# Altium PCB Dolphin.PcbDoc (part 2 of 3)
Units mil, origin at the board's own origin, x right, y up, seen from the top; angles counter-clockwise.
Board outline 4250 x 2750 mil, 4 copper layers (Top Layer, GND, POWER, Bottom Layer); 213 components, 151 nets, 660 pads, 338 vias.
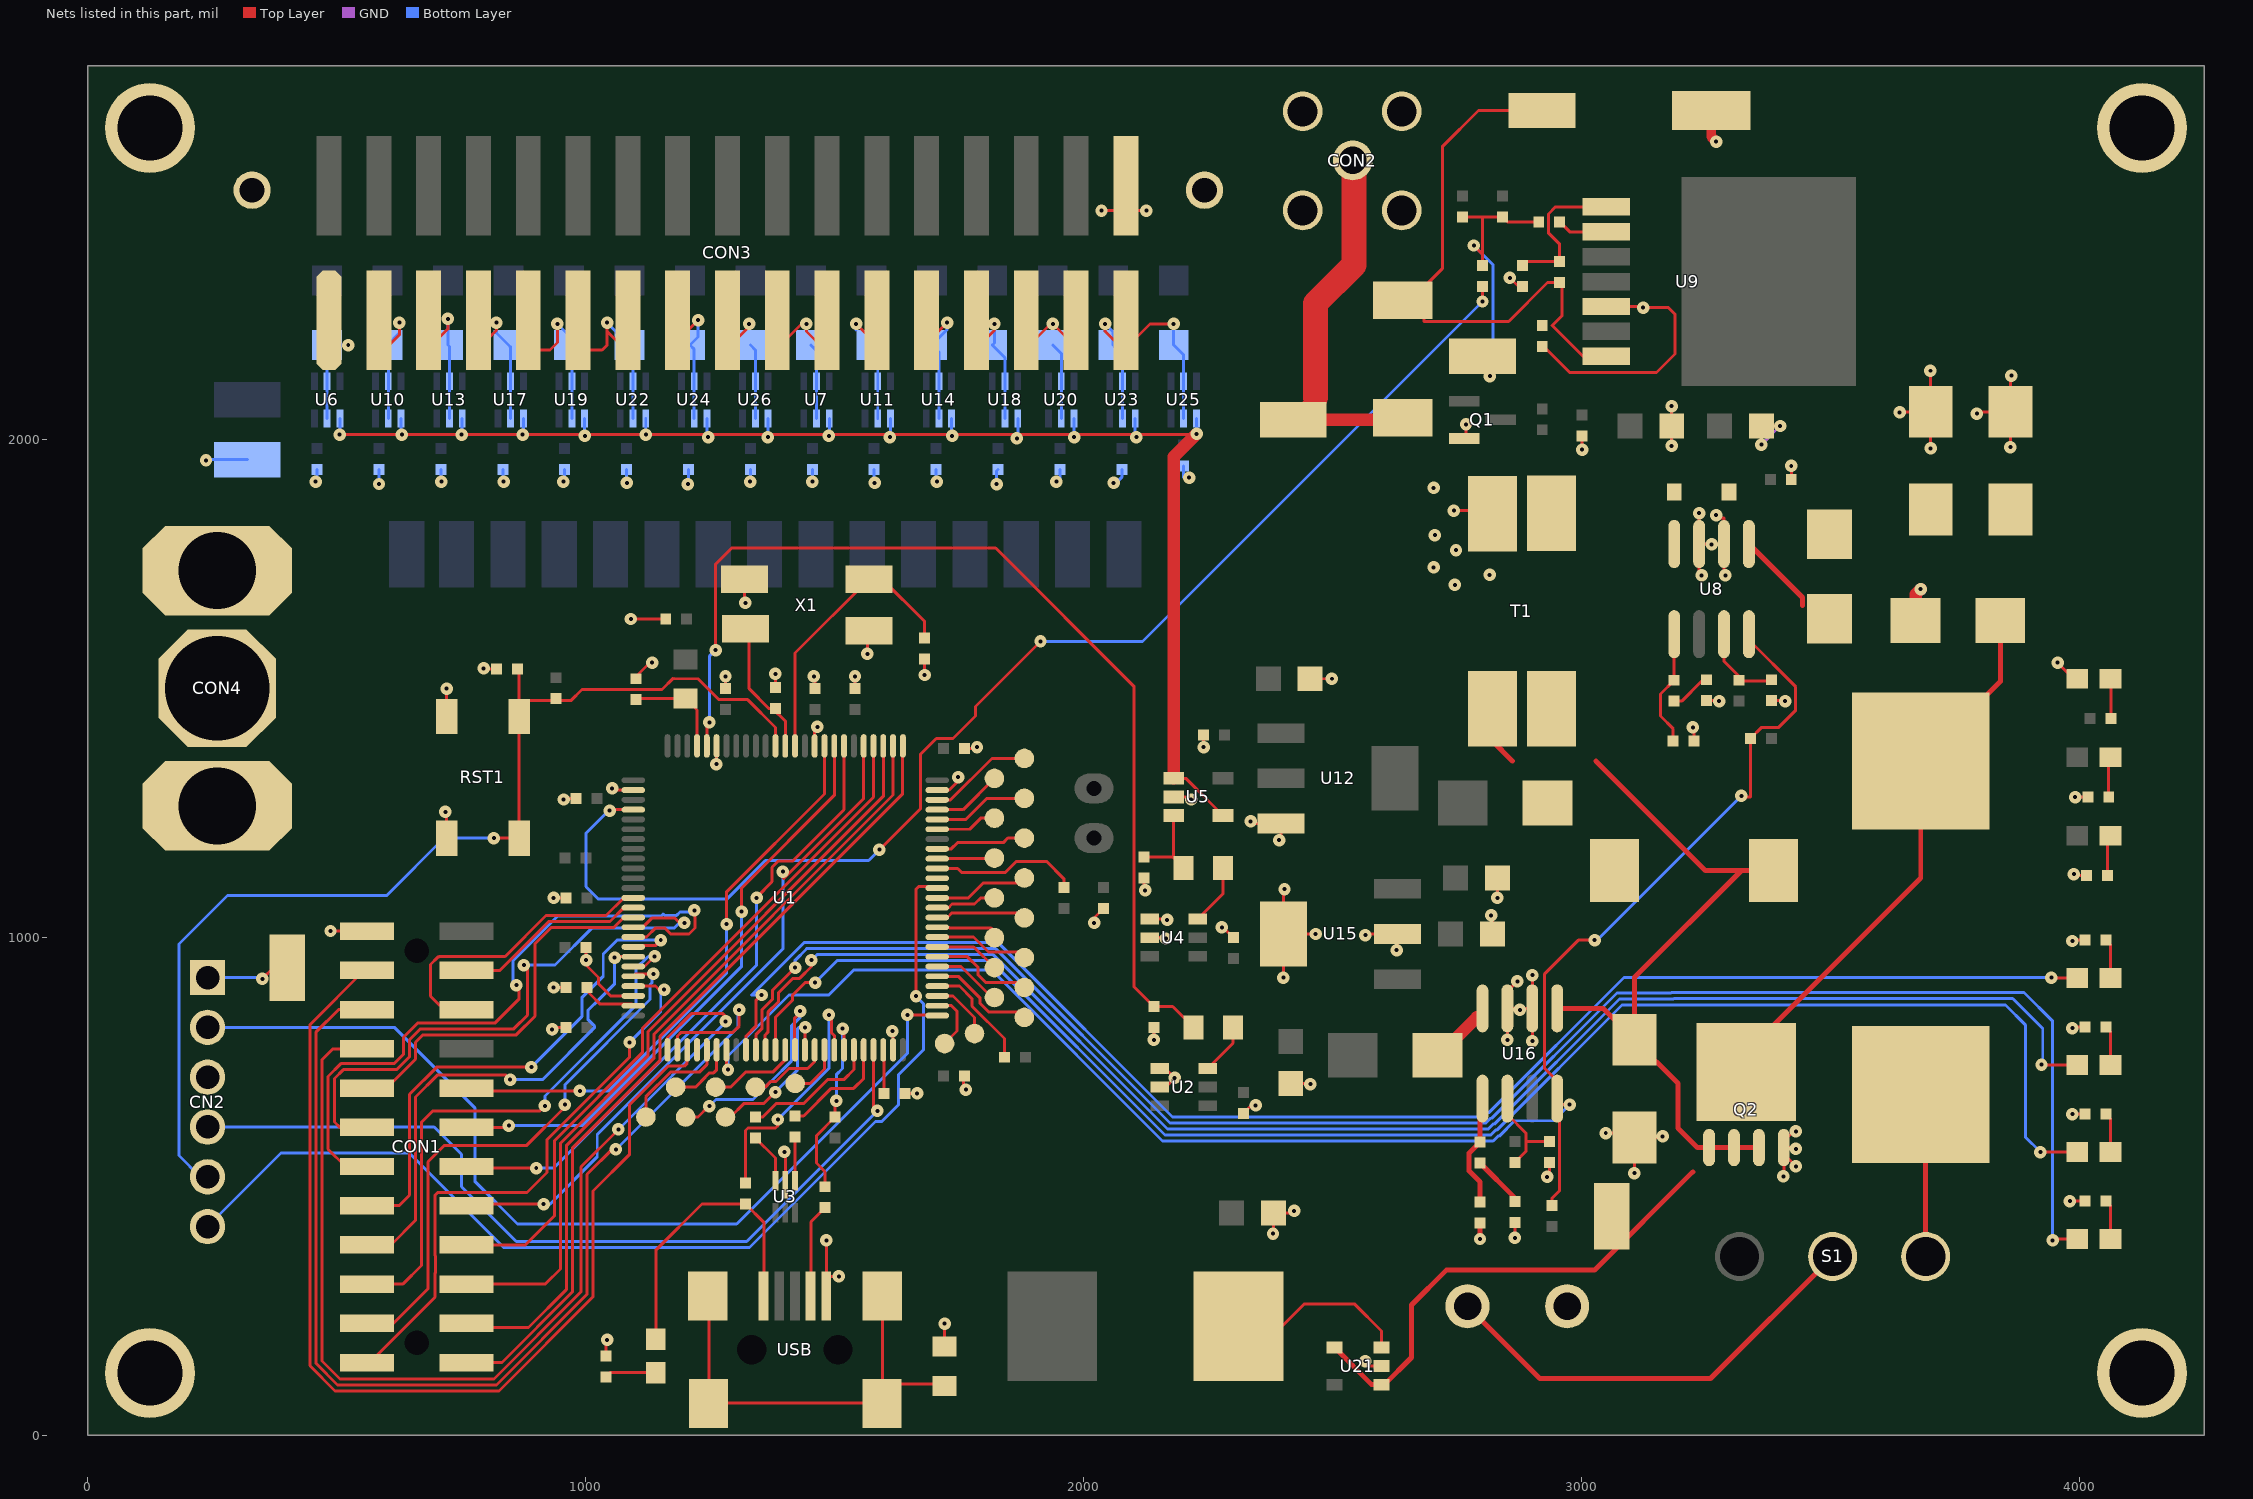
[diagram p4: the nets of this part, all layers, seen from the top]

## Via types
v1: diameter 25, hole 8, Top Layer to Bottom Layer, tented both sides, 336 vias
v2: diameter 25, hole 8, Top Layer to Bottom Layer, 2 vias

## Nets (pads, with @x,y where several pads share a name; then routed paths per layer and width w, separated by ;. In a path a pad name is that pad's centre, name@x,y a point inside that pad or via, vN(x,y) a via of type N, cw(c..) or ccw(c..) an arc to the next point about the centre after c; other vN are vias at no path point) (continued)
GND: C1.1 C2.1 C3.1 C4.1 C5.1 C6.1 C7.1 C8.1 C9.1 C10.1 C11.1 C12.1 C13.1 C14.1 C15.1 C16.2 C17.1 C18.1 C19.1 C20.1 C21.1 C22.2 C23.1 C24.1 C25.1 C26.2 C28.1 C29.1 C31.1 C33.1 C34.1 C35.1 C36.1 C37.2 C38.1 C39.1 C40.1 C41.1 C43.1 C44.1 C45.1 C46.1 C47.1 C48.1 C49.1 C50.1 C51.2 C52.1 CN2.3 CON1.24 CON2.0 CON3.1 CON3.3 CON3.5 CON3.7 CON3.9 CON3.11 CON3.13 CON3.15 CON3.17 CON3.19 CON3.21 CON3.23 CON3.25 CON3.27 CON3.29 CON3.31 CON3.33 CON3.34 CON4.1 D7.1 L6.2 M1.0 M2.0 M3.0 M4.0 pad.0 pad.1 Q1.3 Q2.G R3.2 R4.2 R5.2 R6.1 R7.1 R8.1 R9.1 R10.1 R11.1 R18.2 R19.2 R21.2 R22.2 R28.2 R29.2 R30.2 R31.2 R34.2 R35.2 R37.1 R39.2 R40.2 R41.2 R42.2 R43.2 R44.2 R45.2 R46.2 R47.2 RST1.1 RST1.2 T1.4 TP24.1 TP47.1 TVS1.C U1.10 U1.20 U1.27 U1.74 U1.99 U2.1 U2.2 U3.2 U4.1 U4.2 U5.2 U6.2 U6.5 U7.2 U7.5 U8.6 U8.7 U10.2 U10.5 U11.2 U11.5 U12.3 U13.2 U13.5 U14.2 U14.5 U15.2 U15.4 U16.6 U16.7 U17.2 U17.5 U18.2 U18.5 U19.2 U19.5 U20.2 U20.5 U21.2 U22.2 U22.5 U23.2 U23.5 U24.2 U24.5 U25.2 U25.5 U26.2 U26.5 USB.5 VPWR1.1 X1.2 X1.4 | length 9458.7
  Top Layer w6: v1(487.5,1012.5) 487.89,1012.11 CON1.24@560.65,1012.11 ; CON3.3@580.65,2189.04 580.65,2179.04 595.65,2179.04 625.65,2209.04 v1(625.65,2234.04) ; CON3.5@680.65,2179.04 723.15,2221.54 v1(723.15,2241.54) ; v1(718.15,1251.54) 720.65,1249.04 RST1.1@720.65,1199.04 ; RST1.2@720.65,1443.13 v1(720.65,1499.04) ; CON3.7@780.65,2179.04 820.65,2219.04 v1(820.65,2234.04) ; v1(795,1540) 795.96,1539.04 C10.1@820.65,1539.04 ; CON3.9@880.65,2179.04 928.15,2179.04 943.15,2194.04 v1(943.15,2231.54) ; v2(932.5,815) 936.54,819.04 C8.1@960.65,819.04 ; v1(935.65,899.04) C4.1@960.65,899.04 ; v1(935.65,1079.04) R6.1@960.65,1079.04 ; v1(955.65,1276.54) 958.15,1279.04 C2.1@980.65,1279.04 ; CON3.11@980.65,2179.04 1033.15,2179.04 1042.79,2188.68 1042.79,2216.89 ; R11.1@1040.65,159.04 1040.65,189.04 v1(1043.15,191.54) ; v1(1042.79,2234.04) 1042.79,2216.89 ; v1(1053.15,1299.04) 1056.61,1295.57 U1.27@1095.53,1295.57 ; CON3.13@1080.65,2179.04 1042.79,2216.89 ; v1(1090.65,1639.04) C18.1@1160.65,1639.04 ; C17.1@1100,1522.5 1130,1552.5 1132.18,1552.5 v1(1133.15,1551.54) ; CON3.15@1180.65,2179.04 1180.65,2194.04 v1(1225.65,2239.04) ; v1(1262.5,1347.5) 1262.85,1347.85 U1.20@1262.85,1384.16 ; C7.1@1280.65,1499.04 v1(1280.65,1524.04) ; CON3.17@1280.65,2179.04 1328.15,2226.54 v1(1328.15,2231.54) ; X1.2@1318.65,1719.04 1318.65,1673.54 v1(1320.65,1671.54) ; C16.2@1380.65,1501.04 v1(1380.65,1529.04) ; CON3.19@1380.65,2179.04 v1@1433.15,2231.54 ; v1(1398.83,569.26) 1400.65,567.44 U3.2@1400.65,503.45 ; v1(1443.15,2231.54) 1443.15,2216.54 CON3.21@1480.65,2179.04 ; v1(1458.15,1524.04) 1460.65,1521.54 C1.1@1460.65,1499.04 ; U1.10@1459.7,1384.16 1459.7,1417.2 v1(1465,1422.5) ; v1(1483.15,391.54) 1483.64,391.04 1483.64,319.04 v1(1508.15,319.04) ; C6.1@1540.65,1499.04 v1(1540.65,1524.04) ; v1(1543.15,2231.54) 1580.65,2194.04 CON3.23@1580.65,2179.04 ; v1(1565.65,1569.04) 1565.65,1612.01 X1.4@1568.68,1615.04 ; v1(1615.65,811.54) 1617.18,810 U1.74@1617.18,773.92 ; C5.1@1640.65,686.54 v1(1665.65,686.54) ; v1(1680.65,1526.54) C13.1@1680.65,1559.04 ; CON3.25@1680.65,2179.04 1680.65,2189.04 v1(1725.65,2234.04) ; U1.99@1705.76,1295.57 1729.68,1295.57 1747.89,1313.78 v1(1747.89,1321.68) ; L6.2@1720.65,178.04 v1(1720.65,224.04) ; C3.1@1758.15,719.04 1758.15,699.04 v1(1763.15,694.04) ; C9.1@1760.65,1379.04 1783.15,1379.04 v1(1785.65,1381.54) ; CON3.27@1780.65,2179.04 1820.65,2219.04 v1(1820.65,2231.54) ; CON3.29@1880.65,2179.04 1933.15,2231.54 v1(1938.15,2231.54) 1980.65,2189.04 CON3.31@1980.65,2179.04 ; v1(2020.65,1029.04) 2020.65,1038.65 R5.2@2040,1058 ; v1(2035.65,2459.04) 2070.72,2459.04 2080.65,2449.12 2090.57,2459.04 v1(2125.65,2459.04) ; v1(2043.15,2231.54) 2043.15,2216.54 2080.65,2179.04 2133.15,2231.54 v1(2180.64,2231.54) ; C14.1@2120.65,1119.04 2120.65,1096.54 v1(2123.15,1094.04) ; U4.2@2132.42,999.04 2163.46,999.04 v1(2165,997.5) ; U4.1@2132.42,1036.44 2166.06,1036.44 v1(2167.5,1035) ; v1(2140.65,794.04) C11.1@2140.65,819.04 ; U2.2@2152.42,699.04 2146.45,705 2170,705 v1(2182.5,717.5) 2163.56,736.44 U2.1@2152.42,736.44 ; U5.2@2180.65,1281.64 2210.55,1281.64 v1(2215.65,1276.54) ; v1(2240.65,1381.54) C19.1@2240.65,1406.54 ; v1(2277.5,1020) 2279.68,1020 C12.1@2300.65,999.04 ; C15.1@2320.65,646.54 2336.61,662.5 v1(2345,662.5) ; v1(2335,1232.5) 2339.01,1228.49 U12.3@2396.47,1228.49 2396.47,1198.97 v1(2392.5,1195) ; v1(2380,405) 2380.65,405.65 C48.1@2380.65,446.54 2418.46,446.54 v1(2422.5,450.57) ; v1(2400.65,919.04) 2401.47,919.86 U15.4@2401.47,1006.54 ; v1(2403.15,1096.54) 2401.47,1094.86 U15.4@2401.47,1006.54 ; C38.1@2415.65,706.54 2453.46,706.54 v1(2455,705) ; C26.2@2454.65,1519.04 v1(2498.15,1519.04) ; v1(2465.65,1006.54) U15.4@2401.47,1006.54 ; v1(2565.65,149.04) 2565.65,144.04 2570.65,139.04 U21.2@2597.89,139.04 ; v1(2565.65,1004.04) 2568.15,1006.54 U15.2@2629.82,1006.54 2629.82,975.71 v1(2628.15,974.04) ; v1(2743.15,1856.54) 2814.88,1856.54 T1.4@2820.65,1850.77 ; Q1.3@2764.23,2001.64 2767.5,2004.91 v1(2767.5,2030) ; v1(2795.65,394.04) v1@2795.65,404.04 ; v1(2818.15,1044.04) 2820.65,1041.54 C39.1@2820.65,1006.54 ; v1(2830.65,1079.04) C25.1@2830.65,1119.04 ; v1(2850.65,794.04) U16.7@2850.65,857.09 ; v1(2855.65,2324.04) 2873.15,2306.54 R37.1@2880.65,2306.54 ; v1(2865.55,396.44) R42.2@2865.55,427.54 ; v1(2870.65,911.54) 2850.65,891.54 U16.7@2850.65,857.09 ; v1(2875.65,854.04) v1@2872.59,857.09 ; v1(2900.65,791.54) U16.6@2900.65,857.09 ; v1(2900.65,924.04) U16.6@2900.65,857.09 ; v1(2930.65,519.04) 2935.65,524.04 R39.2@2935.65,547.54 ; v1(3000.65,1979.04) C36.1@3000.65,2006.54 ; v1(3048.15,606.54) 3097.15,606.54 C37.2@3105.65,598.04 ; v1(3105.65,526.54) C37.2@3105.65,598.04 ; v1(3162.5,600) 3160.54,598.04 C37.2@3105.65,598.04 ; v1(3180.65,1986.54) C35.1@3180.65,2026.54 v1(3180.65,2066.54) ; v1(3223.15,1421.54) 3225.65,1419.04 C31.1@3225.65,1394.04 ; v1(3235.65,1851.54) U8.7@3235.65,1789.59 ; v1(3240.65,1726.54) 3238.15,1726.54 3235.65,1729.04 U8.7@3235.65,1789.59 ; R31.2@3250.51,1475.04 3274.65,1475.04 v1(3275.65,1474.04) ; v1@3260.09,1789.59 U8.7@3235.65,1789.59 ; v1(3260.65,1789.04) 3261.2,1789.59 U8.6@3285.65,1789.59 ; v1(3270,1847.5) 3275.65,1841.85 3285.65,1841.85 U8.6@3285.65,1789.59 ; v1(3288.15,1726.54) 3285.65,1729.04 U8.6@3285.65,1789.59 ; C23.1@3360.65,2026.54 v1(3398.15,2026.54) ; R28.2@3380.64,1475.04 3407.15,1475.04 v1(3408.15,1474.04) ; v1(3405,520) 3405.65,520.65 Q2.G@3405.65,577.66 ; C24.1@3420.65,1919.04 v1(3420.65,1946.54) ; v1(3430,540) 3405.65,564.35 Q2.G@3405.65,577.66 ; v1(3430,575) 3427.34,577.66 Q2.G@3405.65,577.66 ; v1(3430,610) 3425,610 3405.65,590.65 Q2.G@3405.65,577.66 ; v1(3638.15,2054.04) 3639.15,2055.04 C22.2@3700.65,2055.04 v1(3700.65,1981.54) ; C22.2@3700,2063.5 v1(3700,2137.5) ; v1(3793.15,2051.54) 3796.65,2055.04 C51.2@3860.65,2055.04 ; v1(3860.65,1984.04) C51.2@3860.65,2055.04 ; v1@3860.65,2121.54 C51.2@3860.65,2055.04 ; v1(3955.65,1551.54) 3955.65,1550.57 D7.1@3987.18,1519.04 ; v1(3980,470) R7.1@4010.58,469.99 ; v1(3985,645) 3985.33,644.67 R8.1@4010.58,644.67 ; v1(3985,817.5) 3986.86,819.36 R9.1@4010.58,819.36 ; v1(3985,992.5) 3986.54,994.04 R10.1@4010.58,994.04 ; v1(3988.15,1126.54) 3990.65,1124.04 R3.2@4013.65,1124.04 ; v1(3990.65,1281.54) R4.2@4016.15,1281.54 ; U16.7@2850.65,857.09 v1@2872.59,857.09 ; v1@2872.59,857.09 U16.6@2900.65,857.09
  Top Layer w10: v1@2795.65,404.04 C43.1@2795.65,426.54
  Top Layer w20: TP47.1@3260,2660 3260,2607.5 v2(3270,2597.5)
  Top Layer w25: TVS1.C@3670.33,1635.85 3670.33,1688.72 v1(3680.65,1699.04)
  GND w6: v2@932.5,805 v2(932.5,815) ; v1@2335,662.5 v1(2345,662.5) ; v1(3360.65,1989.04) v1(3398.15,2026.54)
  Bottom Layer w6: v1(237.5,1957.5) 239.04,1959.04 TP24.1@320.65,1959.04 ; v1(457.5,1915) 460.65,1918.15 C20.1@460.65,1939.04 ; 480.65,2066.54 U6.2@480.65,2041.64 U6.5@480.65,2116.44 R18.2@480.65,2189.04 v1(523.15,2189.04) ; v1(584.93,1910.07) C28.1@584.93,1939.04 ; U10.2@603.5,2041.64 U10.5@603.5,2116.44 603.5,2187.61 R21.2@602.07,2189.04 625.65,2212.61 v1(625.65,2234.04) ; C33.1@709.22,1939.04 709.22,1915.78 v1(710,1915) ; v1(723.15,2241.54) 723.5,2241.18 R29.2@723.5,2189.04 ; U13.2@726.36,2041.64 U13.5@726.36,2116.44 R29.2@726.36,2186.18 ; v1(820.65,2234.04) 820.65,2213.32 R34.2@844.93,2189.04 849.22,2184.75 U17.5@849.22,2116.44 U17.2@849.22,2041.64 ; C40.1@833.5,1939.04 833.5,1916.5 v1(835,1915) ; v1(935.65,1079.04) v1@938.15,1076.54 ; v1(943.15,2231.54) 966.36,2208.32 R40.2@966.36,2189.04 972.07,2183.32 U19.5@972.07,2116.44 U19.2@972.07,2041.64 ; v1(955,1915) 957.79,1917.79 C44.1@957.79,1939.04 ; v1(1042.79,2234.04) R43.2@1087.79,2189.04 1094.93,2181.89 U22.5@1094.93,2116.44 U22.2@1094.93,2041.64 ; C46.1@1082.07,1939.04 1082.07,1912.93 v1(1082.5,1912.5) ; v1(1205,1910) 1206.36,1911.36 C49.1@1206.36,1939.04 ; U24.2@1217.79,2041.64 U24.5@1217.79,2116.44 1217.79,2180.47 R45.2@1209.22,2189.04 1225.65,2205.47 v1(1225.65,2239.04) ; v1(1330,1915) 1330.64,1915.64 C52.1@1330.64,1939.04 ; R47.2@1330.64,2189.04 1340.64,2179.04 U26.5@1340.64,2116.44 U26.2@1340.64,2041.64 ; R19.2@1452.07,2189.04 1463.5,2177.61 U7.5@1463.5,2116.44 U7.2@1463.5,2041.64 ; C21.1@1454.93,1939.04 1454.93,1915.07 v1(1455,1915) ; v1@1543.15,2219.39 v1(1543.15,2231.54) ; R22.2@1573.5,2189.04 1586.36,2176.18 U11.5@1586.36,2116.44 U11.2@1586.36,2041.64 ; C29.1@1579.22,1939.04 1579.22,1913.28 v1(1580,1912.5) ; C34.1@1703.5,1939.04 1703.5,1916.5 v1(1705,1915) ; U14.2@1709.22,2041.64 U14.5@1709.22,2116.44 1709.22,2174.75 R30.2@1694.93,2189.04 1725.65,2219.75 v1(1725.65,2234.04) ; v1(1820.65,2231.54) 1820.65,2193.32 R35.2@1816.36,2189.04 1841.92,2163.48 U18.5@1841.92,2116.44 U18.2@1841.92,2041.64 ; v1(1825,1910) 1825,1936.25 C41.1@1827.79,1939.04 ; R41.2@1937.79,2189.04 1954.93,2171.89 U20.5@1954.93,2116.44 U20.2@1954.93,2041.64 ; v1(1945,1915) 1950,1915 1952.07,1917.07 C45.1@1952.07,1939.04 ; v1(2043.15,2231.54) 2059.22,2215.47 R44.2@2059.22,2189.04 2077.79,2170.47 U23.5@2077.79,2116.44 U23.2@2077.79,2041.64 ; v1(2060,1912.5) 2065,1912.5 2076.36,1923.86 C47.1@2076.36,1939.04 ; v1(2180.64,2231.54) R46.2@2180.64,2189.04 2200.64,2169.04 U25.5@2200.64,2116.44 U25.2@2200.64,2041.64 ; C50.1@2200.64,1946.54 2200.64,1923.14 2200.85,1922.94 v1(2211.64,1922.94) ; v1(2855.65,2324.04) v1@2858.15,2324.04 ; v1(3240.65,1726.54) v1@3240.65,1729.04 ; v1@3258.15,1786.54 v1(3260.65,1789.04)
  other v1: 2745,1707.5 2815,1727.5 2702.5,1742.5 2747.5,1777.5 2705,1807.5 2702.5,1902.5 3862.5,2127.5
HALFREF: U5.1 U5.4 U6.1 U7.1 U10.1 U11.1 U13.1 U14.1 U17.1 U18.1 U19.1 U20.1 U22.1 U23.1 U24.1 U25.1 U26.1 | length 3082.1
  Top Layer w6: v1(505.65,2009.04) v1(630.65,2009.04) v1(750.65,2009.04) v1(873.15,2009.04) v1(1120.65,2009.04) 1488.15,2009.04 1865.65,2009.04 2105.65,2009.04 2224.98,2009.04 v1(2226.65,2010.7) ; U5.1@2180.65,1319.04 2204.96,1319.04 U5.4@2279.76,1244.23
  Top Layer w25: U5.1@2180.65,1319.04 2180.65,1964.7 v1@2224.98,2009.04
  Bottom Layer w6: v1(505.65,2009.04) 506.24,2009.63 U6.1@506.24,2041.64 ; v1@629.09,2010.59 U10.1@629.09,2041.64 ; v1@751.95,2010.34 U13.1@751.95,2041.64 ; v1@874.81,2010.7 U17.1@874.81,2041.64 ; v1@997.66,2007.02 U19.1@997.66,2041.64 ; v1@1120.52,2009.16 U22.1@1120.52,2041.64 ; v1@1243.38,2006.3 U24.1@1243.38,2041.64 ; v1@1366.24,2004.63 U26.1@1366.24,2041.64 ; v1@1489.09,2007.48 U7.1@1489.09,2041.64 ; v1@1611.95,2005.34 U11.1@1611.95,2041.64 ; v1@1734.81,2007.38 U14.1@1734.81,2041.64 ; v1@1867.51,2003.4 U18.1@1867.51,2041.64 ; v1@1980.52,2004.16 U20.1@1980.52,2041.64 ; v1@2103.38,2006.3 U23.1@2103.38,2041.64 ; U25.1@2226.24,2041.64 2226.24,2005.95 2226.65,2006.36 v1(2226.65,2010.7)
  other v1: 1865.65,2001.54 1245.65,2004.04 1365.65,2004.04 1610.65,2004.04 1980.65,2004.04 2105.65,2004.04 998.15,2006.54 1488.15,2006.54 1735.65,2006.54
LED_B: D4.1 U1.62 | length 3239.3
  Top Layer w6: U1.62@1380.96,773.92 1380.96,839.35 1415.65,874.04 1415.65,884.04 1440.65,909.04 v1(1460.65,909.04) ; v1(3920.96,568.72) D4.1@3994.68,568.72
  Bottom Layer w6: v1(1460.65,909.04) 1504.65,953.04 1813.23,953.04 2163.23,603.04 2817.27,603.04 2826.77,612.54 2829.15,612.54 3080.65,864.04 3850.65,864.04 3890.65,824.04 3890.65,599.04 v1(3920.96,568.72)
LED_G: D6.1 U1.59 | length 3109.4
  Top Layer w6: U1.59@1321.9,773.92 1321.9,801.36 1341.65,821.1 1341.65,872.54 v1(1353.15,884.04) ; v1(3943.15,919.04) 3944.1,918.08 D6.1@3994.68,918.08
  Bottom Layer w6: v1(1353.15,884.04) 1333.15,884.04 1438.15,989.04 1828.15,989.04 2178.15,639.04 2802.36,639.04 2811.86,648.54 2814.23,648.54 3084.73,919.04 v1(3943.15,919.04)
LED_O: D3.1 U1.60 | length 3515.1
  Top Layer w6: U1.60@1341.59,773.92 1341.59,804.07 1353.65,816.13 1353.65,854.13 1374.65,875.13 1374.65,893.04 v1(1420.65,939.04) ; v1(3945.65,391.54) 3948.15,394.04 D3.1@3994.68,394.04
  Bottom Layer w6: v1(1420.65,939.04) 1420.65,954.04 1443.12,976.51 1443.12,977.04 1823.17,977.04 2173.17,627.04 2807.33,627.04 2816.83,636.54 2819.2,636.54 3070.7,888.04 3179.65,888.04 3180.65,889.04 3888.15,889.04 3945.65,831.54 v1(3945.65,391.54)
LED_R: D5.1 U1.61 | length 3127.7
  Top Layer w6: U1.61@1361.27,773.92 1360.45,774.74 1360.45,803.85 1365.65,809.04 1365.65,849.16 1386.65,870.16 1386.65,888.07 1416.12,917.54 1429.55,917.54 1453.15,941.13 v1(1453.15,954.04) ; v1(3923.15,744.04) 3923.78,743.4 D5.1@3994.68,743.4
  Bottom Layer w6: v1(1453.15,954.04) 1464.15,965.04 1818.2,965.04 2168.2,615.04 2812.3,615.04 2821.8,624.54 2824.17,624.54 3075.67,876.04 3184.62,876.04 3185.62,877.04 3865.15,877.04 3925.65,816.54 3925.65,746.54 v1(3923.15,744.04)
NetC27_2: C27.2 R23.1 R24.2 R26.1 TP27.1 | length 613.3
  Top Layer w6: R26.1@2760.65,2446.54 R23.1@2840.65,2446.54 2850.65,2436.54 R24.2@2913.65,2436.54 ; v1(2783.15,2389.04) 2800.65,2371.54 ; C27.2@2800.65,2348.54 2800.65,2371.54 ; 2800.65,2444.04 2800.65,2371.54 ; v1(2815.65,2126.54) 2820.65,2131.54 TP27.1@2820.65,2179.04
  Bottom Layer w6: v1(2783.15,2389.04) 2822.15,2350.04 2822.15,2133.04 v1(2815.65,2126.54)
NetC30_1: C30.1 R31.1 | length 81.4
  Top Layer w6: C30.1@3185.65,1474.04 3200.65,1474.04 3240.65,1514.04 R31.1@3250.51,1514.04
NetC30_2: C30.2 C31.2 U8.1 | length 236.4
  Top Layer w6: C31.2@3183.65,1394.04 3183.65,1418.54 3158.15,1444.04 3158.15,1488.54 C30.2@3185.65,1516.04 U8.1@3185.65,1608.49
NetC32_1: C32.1 U9.5 | length 528
  Top Layer w6: C32.1@2923.15,2189.04 2923.15,2186.54 2975.65,2134.04 3149.83,2134.04 3187.14,2171.35 3187.14,2251.12 3174.22,2264.04 v1(3123.15,2264.04) 3120.65,2266.54 U9.5@3048.95,2266.54
NetC32_2: C32.2 R27.1 R33.2 TP28.1 U9.7 | length 1141.7
  Top Layer w6: R27.1@2640.65,2279.04 2656.54,2279.04 2720,2342.5 2720,2587.5 2792.5,2660 TP28.1@2907.5,2660 ; R27.1@2683.15,2272.5 2683.15,2236.54 2853.15,2236.54 2931.15,2314.54 2960.65,2314.54 2960.65,2249.04 ; 2960.65,2248.54 2940.65,2228.54 3002.65,2166.54 U9.7@3048.95,2166.54
NetC42_1: C42.1 R42.1 | length 106
  Top Layer w10: C42.1@2795.65,546.54 2865.55,476.64 R42.1@2865.55,469.54
NetC42_2: C42.2 C43.2 U16.1 | length 220.7
  Top Layer w10: C43.2@2795.65,468.54 2795.65,508.98 2773.65,530.98 2773.65,566.54 C42.2@2795.65,588.54 U16.1@2795.65,670.99
NetCN2_1: CN2.1 TP44.1 | length 170.4
  Top Layer w6: v1(350.65,916.54) 373.15,939.04 TP44.1@400.65,939.04
  Bottom Layer w6: CN2.1@240.65,919.04 348.15,919.04 v1(350.65,916.54)
NetCON2_1: CON2.1 R27.2 TP29.1 | length 783.1
  Top Layer w25: 2465,2083.39 TP29.1@2420.65,2039.04 2616.65,2039.04 R27.2@2620.65,2043.04
  Top Layer w50: 2465,2083.39 2465,2272.5 2542.5,2350 CON2.1@2542.5,2570
NetD1_2: D1.2 R3.1 | length 82.7
  Top Layer w6: D1.2@4049.11,1204.04 4055.65,1197.5 R3.1@4055.65,1124.04
NetD2_2: D2.2 R4.1 | length 82.7
  Top Layer w6: D2.2@4051.61,1361.54 4058.15,1355 R4.1@4058.15,1281.54
NetD3_2: D3.2 R7.2 | length 79.7
  Top Layer w6: R7.2@4052.58,469.99 4061.61,460.96 D3.2@4061.61,394.04
NetD4_2: D4.2 R8.2 | length 79.7
  Top Layer w6: R8.2@4052.58,644.67 4061.61,635.65 D4.2@4061.61,568.72
NetD5_2: D5.2 R9.2 | length 79.7
  Top Layer w6: R9.2@4052.58,819.36 4061.61,810.33 D5.2@4061.61,743.4
NetD6_2: D6.2 R10.2 | length 79.7
  Top Layer w6: R10.2@4052.58,994.04 4061.61,985.01 D6.2@4061.61,918.08
NetD7_2: D7.2 R1.2 | length 83.5
  Top Layer w6: D7.2@4054.11,1519.04 4062.65,1510.5 R1.2@4062.65,1439.04
NetD8_2: D8.2 R11.2 | length 103.5
  Top Layer w6: R11.2@1040.65,117.04 1049.18,125.57 D8.2@1140.65,125.57
NetD9_C: D9.C D11.K
NetD10_C: D10.C T1.2
NetD11_A: D11.A T1.3 U8.8
NetD12_C: D12.C L4.1 U16.8 | length 123.8
  Top Layer w25: D12.C@2699.69,756.81 2720,777.13 2727.13,777.13 U16.8@2789.34,839.34
NetF1_1: F1.1 S1.1 | length 315.4
  Top Layer w10: S1.1@3690.65,359.04 F1.1@3690.65,674.39
NetF1_2: F1.2 Q2.D TVS1.A | length 1117.9
  Top Layer w10: Q2.D@3330.65,729.04 3330.65,769.04 3680.65,1119.04 F1.2@3680.65,1353.68 3840.33,1513.37 TVS1.A@3840.33,1635.85
NetJO3_2: JO3.2 USB.4 | length 149.8
  Top Layer w6: USB.4@1452.14,319.04 1452.14,428.53 JO3.2@1480.65,457.04
NetL1_2: L1.2 U2.6 | length 103.6
  Top Layer w6: U2.6@2248.87,736.44 2299.65,787.21 L1.2@2299.65,819.04
NetL2_2: L2.2 U4.6 | length 123.6
  Top Layer w6: U4.6@2228.87,1036.44 2279.65,1087.21 L2.2@2279.65,1139.04
NetL5_1: L5.1 U21.3 | length 361.4
  Top Layer w6: L5.1@2310.65,219.04 2398.15,219.04 2443.15,264.04 2543.15,264.04 2597.89,209.29 U21.3@2597.89,176.44
NetL6_1: L6.1 USB.0 | length 936.4
  Top Layer w6: USB.0@1245.45,104.47 1284.92,65 1564.88,65 USB.0@1598.91,99.04 ; USB.0@1247.42,102.5 USB.0@1247.42,317.07 ; USB.0@1595.45,318.64 1595.45,102.5 L6.1@1717.18,102.5
NetR13_2: R13.2 U3.3 | length 102.8
  Top Layer w6: R13.2@1340.65,597.04 1380.96,556.72 U3.3@1380.96,510.93
NetR17_1: R17.1 U3.1 | length 88.2
  Top Layer w6: U3.1@1420.33,510.93 1420.33,598.72 R17.1@1420.65,599.04
NetR24_1: R24.1 U9.2 | length 101.6
  Top Layer w6: R24.1@2955.65,2436.54 2975.65,2416.54 U9.2@3048.95,2416.54
NetR25_2: R25.2 R28.1 U8.3 | length 166
  Top Layer w6: U8.3@3285.65,1608.49 3285.65,1554.04 3325.65,1514.04 3345.65,1514.04 R28.1@3380.64,1514.04
NetR33_1: R33.1 R37.2 U9.1 | length 305.1
  Top Layer w6: R37.2@2880.65,2348.54 2888.65,2356.54 R33.1@2955.65,2356.54 2955.65,2391.54 2933.65,2413.54 2933.65,2451.76 2933.15,2452.26 2947.42,2466.54 U9.1@3048.95,2466.54
NetR38_2: R38.2 R39.1 U16.2 | length 201.1
  Top Layer w6: U16.2@2850.65,675.99 2850.65,644.04 2888.15,606.54 2888.15,589.04 ; R38.2@2865.55,547.54 2888.15,570.14 2888.15,589.04 ; R39.1@2935.65,589.54 2888.65,589.54 2888.15,589.04
NetS1_2: S1.2 VPWR1.2 | length 894.5
  Top Layer w10: VPWR1.2@2770.65,259.04 2915.65,114.04 3258.64,114.04 S1.2@3503.64,359.04
NetTP1_1: TP1.1 U1.93 | length 183.8
  Top Layer w6: U1.93@1705.76,1177.46 1734.07,1177.46 1746.53,1189.93 1838.51,1189.93 1847.62,1199.04 TP1.1@1880.65,1199.04
NetTP2_1: TP2.1 U1.96 | length 192.5
  Top Layer w6: U1.96@1705.76,1236.52 1763.13,1236.52 1805.65,1279.04 TP2.1@1880.65,1279.04
NetTP3_1: TP3.1 U1.98 | length 209.3
  Top Layer w6: U1.98@1705.76,1275.89 1732.5,1275.89 1815.65,1359.04 TP3.1@1880.65,1359.04
NetTP4_1: TP4.1 U1.92 | length 115.4
  Top Layer w6: U1.92@1705.76,1157.78 1819.39,1157.78 TP4.1@1820.65,1159.04
NetTP5_1: TP5.1 U1.95 | length 124.1
  Top Layer w6: U1.95@1705.76,1216.83 1770.94,1216.83 1793.15,1239.04 TP5.1@1820.65,1239.04
NetTP6_1: TP6.1 U1.82 | length 209.3
  Top Layer w6: U1.82@1705.76,960.93 1766.26,960.93 1788.15,939.04 1788.15,924.04 1803.15,909.04 1870.65,909.04 TP6.1@1880.65,899.04
NetTP7_1: TP7.1 U1.84 | length 192
  Top Layer w6: U1.84@1705.76,1000.3 1778.82,1000.3 1808.76,970.35 1869.33,970.35 TP7.1@1880.65,959.04
NetTP8_1: TP8.1 U1.86 | length 182.9
  Top Layer w6: U1.86@1705.76,1039.67 1726.27,1039.67 1735.65,1049.04 1870.65,1049.04 TP8.1@1880.65,1039.04
NetTP9_1: TP9.1 U1.88 | length 191.5
  Top Layer w6: U1.88@1705.76,1079.04 1768.15,1079.04 1798.15,1109.04 1870.65,1109.04 TP9.1@1880.65,1119.04
NetTP10_1: TP10.1 U1.97 | length 140.9
  Top Layer w6: U1.97@1705.76,1256.2 1757.81,1256.2 TP10.1@1820.65,1319.04
NetTP11_1: TP11.1 U1.80 | length 215.3
  Top Layer w6: U1.80@1705.76,921.56 1748.13,921.56 1791.96,877.72 1791.96,867.16 1808.76,850.35 1869.33,850.35 TP11.1@1880.65,839.04
NetTP12_1: TP12.1 U1.81 | length 140.6
  Top Layer w6: U1.81@1705.76,941.24 1753.44,941.24 1815.65,879.04 TP12.1@1820.65,879.04
NetTP13_1: TP13.1 U1.83 | length 132.1
  Top Layer w6: U1.83@1705.76,980.61 1779.07,980.61 TP13.1@1820.65,939.04
NetTP14_1: TP14.1 U1.85 | length 130.9
  Top Layer w6: U1.85@1705.76,1019.98 1729.09,1019.98 1730.03,1019.04 1813.15,1019.04 1820.65,1011.54 TP14.1@1820.65,999.04
NetTP15_1: TP15.1 U1.87 | length 123
  Top Layer w6: U1.87@1705.76,1059.35 1728.46,1059.35 1735.65,1066.54 1780.65,1066.54 1793.15,1079.04 TP15.1@1820.65,1079.04
NetTP45_1: TP45.1 U1.78 | length 125.3
  Top Layer w6: U1.78@1705.76,882.19 1737.5,882.19 1780.65,839.04 TP45.1@1780.65,806.54
NRST: C10.2 CN2.5 R2.1 RST1.3 RST1.4 U1.14 | length 2187
  Top Layer w6: v1(815.65,1199.04) RST1.3@866.31,1199.04 RST1.4@866.31,1443.13 ; C10.2@866.31,1535.37 866.31,1475 938.2,1475 970.07,1475 992.57,1497.5 1153.15,1497.5 1175.65,1520 1176.61,1519.04 1225.65,1519.04 1267.65,1477.04 1325.15,1477.04 1380.96,1421.22 U1.14@1380.96,1384.16
  Bottom Layer w6: CN2.5@240.65,519.04 225.65,519.04 183.15,561.54 183.15,986.54 280.65,1084.04 600.65,1084.04 715.65,1199.04 v1(815.65,1199.04)
OSC_IN: C13.2 U1.12 X1.3 | length 576.5
  Top Layer w6: U1.12@1420.33,1384.16 1420.33,1570.69 X1.3@1568.68,1719.04 1595.65,1719.04 1680.65,1634.04 C13.2@1680.65,1601.04
OSC_OUT: C16.1 U1.13 X1.1 | length 272.4
  Top Layer w6: X1.1@1320.65,1619.04 1328.15,1611.54 1328.15,1499.04 1368.15,1459.04 1375.65,1459.04 1400.65,1434.04 U1.13@1400.65,1384.16
PA8: TP16.1 U1.67 | length 109.3
  Top Layer w6: TP16.1@1420.65,706.54 1450.65,706.54 1479.39,735.28 U1.67@1479.39,773.92
PA10/USART1_RX/USB_ID: JO3.1 R12.1 U1.69 | length 395.4
  Top Layer w6: JO3.1@1480.65,499.04 1480.65,529.04 1463.15,546.54 1463.15,601.54 R12.1@1500.65,639.04 1500.65,674.04 v1(1503.15,671.54) ; v1(1515.65,816.54) 1518.76,813.43 U1.69@1518.76,773.92
  Bottom Layer w6: v1(1503.15,671.54) 1503.15,724.04 1515.65,736.54 v1(1515.65,816.54)
PA13/JTMS: CN2.4 U1.72 | length 1712.7
  Top Layer w6: U1.72@1577.81,773.92 1577.81,659.37 v1(1585.65,651.54)
  Bottom Layer w6: CN2.4@240.65,619.04 695.65,619.04 750.65,564.04 750.65,499.04 860.65,389.04 1323.15,389.04 v1(1585.65,651.54)
PA14/JTCK: CN2.2 U1.76 | length 1920.8
  Top Layer w6: v1(1645.65,844.04) U1.76@1692.09,844.04
  Bottom Layer w6: CN2.2@240.65,819.04 615.65,819.04 778.15,656.54 778.15,509.04 863.15,424.04 1303.15,424.04 1395.8,516.7 1645.65,766.54 v1(1645.65,844.04)
PA15/JTDI: TP46.1 U1.77 | length 119.8
  Top Layer w6: U1.77@1705.76,862.5 1734.68,862.5 1745.65,851.54 1745.65,811.54 TP46.1@1720.65,786.54
PB3/JTDO: CN2.6 U1.89 | length 2151.5
  Top Layer w6: v1(1663.15,881.54) 1663.15,1096.54 1668.15,1101.54 1702.95,1101.54 U1.89@1705.76,1098.72
  Bottom Layer w6: CN2.6@240.65,419.04 388.15,566.54 645.65,566.54 835.15,377.04 1328.65,377.04 1581.65,630.04 1594.55,630.04 1628.15,663.63 1628.15,724.04 1678.15,774.04 1678.15,866.54 v1(1663.15,881.54)
PB4/NJTRST: U1.90
PB05/CAN2_RX: R16.1 U1.91 | length 298.9
  Top Layer w6: U1.91@1705.76,1138.09 1746.91,1138.09 1755,1130 1842.5,1130 1865,1152.5 1925,1152.5 1960,1117.5 R16.1@1960,1100
PB10: CON1.2 U1.47 | length 1174.7
  Top Layer w6: CON1.2@560.65,145.97 566.29,145.97 697.51,277.19 697.51,325.33 698.15,325.96 698.15,360.31 697.51,360.94 697.51,482.17 702.78,487.45 881.96,487.45 922.15,527.63 922.15,593.42 1088.15,759.42 v1(1088.15,789.04) ; U1.47@1095.53,901.87 1140.31,901.87 1150.65,891.54 1154.11,895 v1(1157.5,895)
  Bottom Layer w6: v1(1088.15,789.04) 1150.65,851.54 1150.65,891.54 1154.11,895 v1(1157.5,895)
PB11/USART3_RX: R15.1 U1.48 | length 172.8
  Top Layer w6: v1(1000.65,954.04) v1@1000.65,944.04 ; R15.1@1000.65,979.04 v1@1000.65,944.04 ; U1.48@1095.53,882.19 1050,882.19 1025.65,906.54 1025.65,919.04 v1@1000.65,944.04
PB12: CON1.18 U1.51 | length 2152
  Top Layer w6: CON1.18@560.65,775.89 492.5,775.89 470.65,754.04 470.65,149.04 506.65,113.04 815.7,113.04 990.65,287.98 990.65,539.04 v1(1065.65,614.04) ; U1.51@1164.42,773.92 1164.42,798.88 1212.09,846.54 1275.24,846.54 1285.65,836.13 v1(1280.72,831.21)
  Bottom Layer w6: v1(1065.65,614.04) 1280.72,829.11 v1(1280.72,831.21)
PB13: CON1.20 U1.52 | length 2320.6
  Top Layer w6: CON1.20@560.65,854.63 503.74,854.63 458.15,809.04 458.65,808.54 458.65,144.07 501.67,101.04 820.67,101.04 1002.65,283.01 1002.65,524.04 1055.15,576.54 1058.15,576.54 v1(1060.65,574.04) ; U1.52@1184.11,773.92 1184.11,801.59 1191.56,809.04 1295.65,809.04 1308.15,821.54 v1(1308.15,854.04)
  Bottom Layer w6: v1(1060.65,574.04) 1305.65,819.04 1305.65,851.54 v1(1308.15,854.04)
PB14: CON1.22 U1.53 | length 2105.5
  Top Layer w6: CON1.22@560.65,933.37 555,933.37 446.15,824.51 446.15,139.6 496.7,89.04 825.65,89.04 1014.65,278.04 1014.65,490.54 1088.15,564.04 1088.15,664.07 1165.11,741.04 1197.65,741.04 1203.79,747.19 U1.53@1203.79,773.92
PB15: U1.54
PC6: TP20.1 U1.63 | length 182.7
  Top Layer w6: TP20.1@1260.65,699.04 1290.65,699.04 1320.65,729.04 1375.65,729.04 1400.65,754.04 U1.63@1400.65,773.92
PC7: TP19.1 U1.64 | length 450
  Top Layer w6: TP19.1@1200.65,639.04 1225.27,639.04 1247.77,661.54 v1(1248.46,660.85) ; U1.64@1420.33,773.92 1419.15,775.1 1419.15,837.54 1430.65,849.04 v1(1430.65,851.54)
  Bottom Layer w6: v1(1248.46,660.85) 1261.64,674.04 1335.65,674.04 1359.15,697.54 1359.15,697.94 1371.74,710.54 1372.15,710.54 1413.65,752.04 1413.65,822.44 1430.65,839.44 v1(1430.65,851.54)
PC8: TP18.1 U1.65 | length 328.6
  Top Layer w6: TP18.1@1280.65,639.04 1290.65,639.04 1318.15,666.54 1358.15,666.54 v1(1380.65,689.04) ; U1.65@1440.02,773.92 v1@1440.02,819.67
  Bottom Layer w6: v1(1380.65,689.04) 1425.65,734.04 1425.65,816.54 1428.15,819.04 v1(1440.65,819.04)
PC9: TP17.1 U1.66 | length 163.7
  Top Layer w6: TP17.1@1340.65,699.04 1360.24,699.04 1371.74,710.54 1382.15,710.54 1408.15,736.54 1445.65,736.54 1459.7,750.59 U1.66@1459.7,773.92
PC11/USART3_RX: R14.1 U1.79 | length 224.8
  Top Layer w6: U1.79@1705.76,901.87 1750.31,901.87 1775.65,876.54 1775.65,861.54 1840.65,796.54 R14.1@1840.65,759.04
PC13: CON1.11 U1.7 | length 1282.4
  Top Layer w6: CON1.11@760.65,539.67 763.78,536.54 v1(900.65,536.54) ; v1(1343.15,1079.04) 1343.15,1080.48 1374.15,1111.48 1374.15,1140.44 1386.74,1153.04 1415.7,1153.04 1518.76,1256.09 U1.7@1518.76,1384.16
  Bottom Layer w6: v1(900.65,536.54) 935.65,536.54 1343.15,944.04 v1(1343.15,1079.04)
PC14: CON1.13 U1.8 | length 1206
  Top Layer w6: CON1.13@760.65,618.41 842.52,618.41 v1(845.65,621.54) ; v1(1313.15,1051.54) 1313.15,1099.04 1499.07,1284.96 U1.8@1499.07,1384.16
  Bottom Layer w6: v1(845.65,621.54) 993.15,621.54 1313.15,941.54 v1(1313.15,1051.54)
PC15: CON1.15 U1.9 | length 1159.9
  Top Layer w6: CON1.15@760.65,697.15 766.26,691.54 v1(988.15,691.54) ; v1(1283.15,1026.54) 1283.15,1091.54 1479.39,1287.78 U1.9@1479.39,1384.16
  Bottom Layer w6: v1(988.15,691.54) 1046.17,691.54 1283.15,928.51 v1(1283.15,1026.54)
PD8: TP22.1 U1.55 | length 219.6
  Top Layer w6: TP22.1@1120.65,639.04 1120.65,679.6 1170.08,729.04 1228.15,729.04 1243.15,744.04 U1.55@1243.16,773.92
PD9: TP21.1 U1.56 | length 137.1
  Top Layer w6: TP21.1@1180.65,699.04 1220.65,699.04 1231.96,710.35 1231.96,710.92 1248.76,727.72 1256.83,727.72 1262.85,733.74 U1.56@1262.85,773.92
PE2: CON1.1 U1.1 | length 1642.7
  Top Layer w6: CON1.1@760.65,145.97 831.66,145.97 973.15,287.45 973.15,576.54 1149.52,752.91 1149.52,800.94 1635.65,1287.07 1635.65,1361.54 1636.87,1362.76 U1.1@1636.87,1384.16
PE3: CON1.3 U1.2 | length 1598.8
  Top Layer w6: CON1.3@760.65,224.71 777.48,224.71 785.65,216.54 885.26,216.54 961.15,292.42 961.15,581.51 1137.52,757.88 1137.52,805.91 1617.18,1285.57 U1.2@1617.18,1384.16
PE4: CON1.5 U1.3 | length 1519.8
  Top Layer w6: CON1.5@760.65,303.45 761.24,304.04 919.15,304.04 949.15,334.04 949.15,586.48 1125.52,762.85 1125.52,810.88 1597.5,1282.86 U1.3@1597.5,1384.16
PE5: CON1.7 U1.4 | length 1409.7
  Top Layer w6: CON1.7@760.65,382.19 878.79,382.19 937.15,440.54 937.15,591.45 1113.52,767.82 1113.52,816.91 1577.81,1281.2 U1.4@1577.81,1384.16
PE6: CON1.9 U1.5 | length 1377.9
  Top Layer w6: CON1.9@760.65,460.93 763.76,464.04 v1(915.65,464.04) ; v1(1395.65,1131.54) 1397.16,1130.02 1397.16,1117.52 1558.13,1278.49 U1.5@1558.13,1384.16
  Bottom Layer w6: v1(915.65,464.04) 928.15,464.04 1023.15,559.04 1023.15,604.04 1395.65,976.54 v1(1395.65,1131.54)
PE7: CON1.19 U1.38 | length 620.2
  Top Layer w6: CON1.19@760.65,854.63 751.24,864.04 705.65,864.04 688.15,881.54 688.15,945.25 702.78,959.89 704,959.89 705.65,961.54 785.65,961.54 ; 795.65,961.54 785.65,961.54 ; U1.38@1095.53,1079.04 1076.42,1079.04 1040.92,1043.54 920.15,1043.54 838.15,961.54 785.65,961.54
PE8: CON1.21 U1.39 | length 387.1
  Top Layer w6: CON1.21@760.65,933.37 827.48,933.37 925.65,1031.54 1048.6,1031.54 1076.1,1059.04 1095.21,1059.04 U1.39@1095.53,1059.35
PE9: CON1.16 U1.40 | length 781.9
  Top Layer w6: CON1.16@560.65,697.15 600.23,697.15 658.15,755.06 658.15,789.04 673.15,804.04 860.65,804.04 898.15,841.54 898.15,987.07 930.62,1019.54 1056.29,1019.54 1076.42,1039.67 U1.40@1095.53,1039.67
PE10: CON1.14 U1.41 | length 1193.7
  Top Layer w6: CON1.14@560.65,618.41 506.27,618.41 495.65,629.04 495.65,716.53 513.15,734.04 620.15,734.04 646.15,760.04 646.15,794.01 668.17,816.04 855.67,816.04 883.15,843.51 883.15,936.54 v1(875.65,944.04) ; U1.41@1095.53,1019.98 1096.47,1019.04 1113.69,1019.04 1133.69,1039.04 1178.15,1039.04 1188.15,1029.04 v1(1198.15,1029.04)
  Bottom Layer w6: v1(875.65,944.04) 938.15,944.04 1013.15,1019.04 1178.15,1019.04 1188.15,1029.04 v1(1198.15,1029.04)
PE11: CON1.12 U1.42 | length 1377.1
  Top Layer w6: CON1.12@560.65,539.67 517.52,539.67 482.65,574.54 482.65,720.5 508.18,746.04 615.18,746.04 634.15,765.01 634.15,798.98 663.28,828.11 818.51,828.11 865.65,875.25 865.65,899.04 v1(860.65,904.04) ; U1.42@1095.53,1000.3 1121.9,1000.3 1140.65,1019.04 1158.15,1019.04 1170.65,1006.54 1207.55,1006.54 1219.65,1018.63 1219.65,1052.54 v1(1218.15,1054.04)
  Bottom Layer w6: v1(860.65,904.04) 854.15,910.54 854.15,952.94 944.24,1043.04 1152.15,1043.04 1155.65,1046.54 1158.15,1044.04 1182.74,1044.04 1189.24,1050.54 1207.05,1050.54 1210.85,1046.74 v1(1218.15,1054.04)
PE12: CON1.10 U1.43 | length 1038.7
  Top Layer w6: CON1.10@560.65,460.93 625.03,460.93 646.15,482.04 646.15,684.54 700.65,739.04 v1(890.65,739.04) ; U1.43@1095.53,980.61 1097.95,983.04 1139.65,983.04 v1(1150.65,994.04)
  Bottom Layer w6: v1(890.65,739.04) 992.15,840.54 992.15,878.51 1035.17,921.54 1035.17,966.47 1062.74,994.04 v1(1150.65,994.04)
PE13: CON1.8 U1.44 | length 991.5
  Top Layer w6: CON1.8@566.29,382.19 608.79,382.19 658.15,431.54 658.15,679.04 702.78,723.67 838.51,723.67 v1(848.15,714.04) ; v1(1058.15,959.04) 1060.03,960.93 U1.44@1095.53,960.93
  Bottom Layer w6: v1(848.15,714.04) 913.15,714.04 1017.15,818.04 1017.15,822.13 1004.15,835.13 1004.15,852.94 1016.74,865.54 1017.15,865.54 1058.15,906.54 v1(1058.15,959.04)
PE14: CON1.6 U1.45 | length 1123.7
  Top Layer w6: CON1.6@560.65,303.45 632.55,303.45 670.15,341.04 670.15,628.54 693.15,651.54 908.15,651.54 v1(918.15,661.54) ; U1.45@1095.53,941.24 1117.85,941.24 v1(1138.15,961.54)
  Bottom Layer w6: v1(918.15,661.54) 918.15,681.01 1100.65,863.51 1100.65,936.54 1125.65,961.54 v1(1138.15,961.54)
PE15: CON1.4 U1.46 | length 1110
  Top Layer w6: CON1.4@560.65,224.71 613.81,224.71 683.15,294.04 683.15,549.04 715.65,581.54 880.65,581.54 958.15,659.04 v1(958.15,664.04) ; U1.46@1095.53,921.56 1100.31,926.34 1135.44,926.34 v1(1135.65,926.54)
  Bottom Layer w6: v1(958.15,664.04) 958.15,704.04 1129.15,875.04 1129.15,904.44 1133.15,908.44 1133.15,924.04 v1(1135.65,926.54)
SIGGEN_EN: R20.2 R36.2 U1.57 U8.4 U16.4 | length 3518
  Top Layer w6: U1.57@1282.53,773.92 1282.53,737.15 v1(1285.65,734.04) ; R36.2@2940.65,461.04 2940.65,476.54 2955.65,491.54 2955.65,629.04 2950.65,634.04 U16.4@2950.65,669.04 ; v1(2975.65,664.04) 2960.65,664.04 2950.65,654.04 U16.4@2950.65,669.04 ; v1(3025.65,994.04) 2993.15,994.04 2925.65,926.54 2925.65,736.54 2950.65,711.54 U16.4@2950.65,675.99 U16.4@2950.65,669.04 ; v1(3320.65,1284.04) 3322.65,1282.04 3338.65,1282.04 R20.2@3338.65,1399.04 3361.15,1421.54 3395.65,1421.54 3429.65,1455.54 3429.65,1502.76 3335.65,1596.76 U8.4@3335.65,1608.49
  Bottom Layer w6: v1(1285.65,734.04) 1285.65,761.54 1408.15,884.04 1488.15,884.04 1538.15,934.04 1815.26,934.04 2158.26,591.04 2822.24,591.04 2831.74,600.54 2834.12,600.54 2865.12,631.54 2943.15,631.54 v1(2975.65,664.04) ; v1(3025.65,994.04) 3028.15,991.54 v1(3320.65,1284.04)
USB_M: R13.1 U1.70 | length 276.9
  Top Layer w6: R13.1@1340.65,639.04 1355.65,639.04 1383.15,666.54 1438.15,666.54 1485.65,714.04 1518.15,714.04 1538.44,734.33 U1.70@1538.44,773.92
USB_P: R17.2 U1.71 | length 226.1
  Top Layer w6: R17.2@1420.65,641.04 1437.65,641.04 1493.15,696.54 1538.15,696.54 1558.13,716.52 U1.71@1558.13,773.92
USB_VBUS: JO2.1 U1.68 | length 513.9
  Top Layer w6: JO2.1@1320.65,506.54 1320.65,611.76 1325.92,617.04 1381.15,617.04 1385.65,621.54 v1(1385.65,634.04) ; v1(1488.15,844.04) 1493.15,839.04 1493.15,808.63 1499.07,802.71 U1.68@1499.07,773.92
  Bottom Layer w6: v1(1385.65,634.04) 1488.15,736.54 v1(1488.15,844.04)
VCAP_1: C4.2 U1.49 | length 107.8
  Top Layer w6: C4.2@1002.65,899.04 1002.65,892.04 1010.65,884.04 1029.15,865.54 U1.49@1092.49,865.54
VCAP_2: C5.2 U1.73 | length 87.9
  Top Layer w6: U1.73@1597.5,773.92 1598.65,772.77 C5.2@1598.65,686.54
VDAC1: C27.1 U1.29 | length 2634.6
  Top Layer w6: v1(1048.15,1254.04) 1050.31,1256.2 U1.29@1095.53,1256.2 ; v1(1589.83,1175.72) 1672.65,1258.54 1672.65,1367.76 1703.92,1399.04 1737.37,1399.04 1782.65,1444.31 1782.65,1463.54 v1(1913.15,1594.04) ; v1(2800.65,2276.54) C27.1@2800.65,2306.54
  Bottom Layer w6: v1(1048.15,1254.04) 1045.65,1254.04 1000.65,1209.04 1000.65,1101.54 1025.65,1076.54 1283.15,1076.54 1360.65,1154.04 1568.15,1154.04 v1(1589.83,1175.72) ; v1(1913.15,1594.04) 2118.15,1594.04 v1(2800.65,2276.54)
VDDA: C17.2 L3.1 U1.22 | length 197.8
  Top Layer w6: C17.2@1107.18,1479.04 L3.1@1200.65,1479.04 1223.48,1456.2 U1.22@1223.48,1384.16
VINPWR: C22.1 C37.1 C51.1 D9.A L4.2 Q2.S T1.1 TP42.1 U8.5 U16.5 U21.1 U21.4 | length 2728.7
  Top Layer w10: U21.4@2503.4,176.44 2578.2,101.64 U21.1@2597.89,101.64 2603.6,101.64 2658.15,156.18 2658.15,261.54 2728.15,331.54 3025.65,331.54 3223.15,529.04 ; T1.1@2820.65,1459.04 2820.65,1394.04 2860.65,1354.04 ; U16.5@2950.65,857.09 3042.59,857.09 C37.1@3105.65,794.04 ; 3028.15,1354.04 3248.15,1134.04 3320.65,1134.04 ; U8.5@3335.65,1789.59 3443.15,1682.09 3443.15,1666.54 ; Q2.S@3355.65,577.66 Q2.S@3305.65,577.66 Q2.S@3255.65,577.66 3232.02,577.66 3193.15,616.54 3193.15,706.54 C37.1@3105.65,794.04 ; L4.2@3384.53,1134.04 3320.65,1134.04 ; C37.1@3105.65,794.04 3105.65,919.04 3320.65,1134.04
VREF+: C11.2 L1.1 U1.21 | length 2097.5
  Top Layer w6: U1.21@1243.16,1384.16 1243.16,1426.56 v1(1248.15,1431.54) ; v1(1260.65,1576.54) 1260.65,1749.04 1293.15,1781.54 1823.15,1781.54 2100.65,1504.04 2100.65,901.04 C11.2@2140.65,861.04 2178.65,861.04 L1.1@2220.65,819.04
  Bottom Layer w6: v1(1248.15,1431.54) 1248.15,1564.04 v1(1260.65,1576.54)
VREF_HALF+: C14.2 L2.1 U5.3 | length 171.5
  Top Layer w6: C14.2@2120.65,1161.04 2178.65,1161.04 ; U5.3@2180.65,1244.23 2180.65,1159.04 L2.1@2200.65,1139.04
VUSB: D8.1 JO2.2 USB.1 | length 558.4
  Top Layer w6: D8.1@1140.65,192.5 1140.65,371.54 1233.65,464.54 JO2.2@1320.65,464.54 1357.65,427.53 USB.1@1357.65,319.04
pads on no net: CON1.0 CON3.32 S1.3 U2.3 U2.5 U4.3 U4.5 U8.2 U16.3 USB.H
copper on no net: | length 7.1
  Top Layer w6: 3738.15,2261.54 3743.15,2266.54

## Polygon pours and split planes (outlines as drawn)
GND on Top Layer "gnd@top" (solid, pour order 1006): 2707.5,1945 2887.5,1945 2887.5,1665 2667.5,1665 2667.5,1940.89 2669.85,1943.25 2671.61,1945 2707.5,1945
GND on Top Layer "gnd@top" (solid, pour order 1005): 2107.5,1142.5 2172.5,1142.5 2177.5,1137.5 2177.5,1097.5 2177.5,1095 2200,1072.5 2205,1067.5 2205,972.5 2105.65,972.5 2100.65,977.5 2107.5,984.35 2107.5,1142.5
GND on Top Layer "gnd@top" (solid, pour order 1004): 2108.28,755 2108.28,845 2170.52,845 2173.79,845 2190.17,832.5 2200,825 2200,727.5 2200,672.5 2105,672.5 2105,752.5 2108.28,755
GND on Top Layer "gnd@top" (solid, pour order 1003): 2350,497.5 2465,497.5 2465,385 2347.5,385 2347.5,495 2350,497.5
GND on Top Layer "gnd@top" (solid, pour order 1002): 2772.62,443.09 2876.91,443.09 2877.5,442.5 2900,465 2900,517.5 2900,547.5 2922.5,570 2955.65,570 2955.65,491.54 2940.65,476.54 2887.5,423.39 2887.5,367.5 2787.55,367.5 2773.01,382.03 2772.62,382.43 2772.62,443.09
GND on Top Layer "gnd@top" (solid, pour order 1001): 3383.15,624.04 3384.68,622.5 3462.5,622.5 3462.5,505 3450,492.5 3447.33,489.83 3383.15,489.83 3383.15,624.04
GND on Top Layer "gnd@top" (solid, pour order 1000): 3595,2207.5 3927.5,2207.5 3927.5,1975 3930,1972.5 3925,1967.5 3605,1967.5 3597.5,1967.5 3595,1970 3595,2207.5
NetF1_1 on Top Layer "VPWR@TOP" (solid, pour order 1005): 3878.15,264.04 3878.15,901.54 3888.15,911.54 3548.15,911.54 3510.65,881.54 3475.65,846.54 3475.65,496.54 3483.15,496.54 3603.15,376.54 3603.15,264.04
NetF1_2 on Top Layer "VPWR@TOP" (solid, pour order 1006): 3948.15,1729.04 3770.65,1729.04 3770.65,1629.04 3665.65,1524.04 3660.65,1519.04 3505.65,1519.04 3505.65,1059.04 3413.15,966.54 3318.15,871.54 3228.15,871.54 3228.15,631.54 3230.65,629.04 3443.15,629.04 3443.15,831.54 3483.15,871.54 3548.15,936.54 3598.15,936.54 3843.15,936.54 3865.65,959.04 3895.65,989.04 3895.65,1001.54 3895.65,1579.04 3950.65,1634.04 3948.15,1636.54 3948.15,1729.04
-6V on Top Layer "-6V@TOP" (solid, pour order 1007): 2328.15,1376.54 2513.15,1376.54 2543.15,1406.54 2600.65,1406.54 2665.65,1406.54 2693.15,1379.04 2738.15,1334.04 2745.65,1334.04 2833.15,1334.04 2838.15,1329.04 2838.15,1234.04 2838.15,1204.04 2793.15,1159.04 2790.65,1156.54 2790.65,1081.54 2790.65,1064.04 2788.15,1061.54 2783.15,1056.54 2718.15,1056.54 2715.65,1056.54 2698.15,1074.04 2698.15,1161.54 2645.65,1214.04 2618.15,1241.54 2495.65,1241.54 2485.65,1241.54 2463.15,1264.04 2458.15,1269.04 2328.15,1269.04 2328.15,1376.54
VINPWR on Top Layer "VPWR@TOP" (solid, pour order 1008): 3383.15,624.04 3230.65,624.04 3210.65,644.04 3210.65,884.04 3360.65,1034.04 3458.15,1034.04 3495.65,1071.54 3495.65,1219.04 3455.65,1259.04 3223.15,1259.04 3073.15,1409.04 3073.15,1584.04 2750.65,1584.04 2703.15,1536.54 2705.65,1369.04 2733.15,1339.04 2870.65,1336.54 2870.65,1539.04 3008.15,1539.04 3005.65,1336.54 3180.65,1164.04 3178.15,1161.54 3178.15,1071.54 3038.15,931.54 2930.65,931.54 2930.65,799.04 3060.65,669.04 3150.65,669.04 3168.15,651.54 3168.15,556.54 3173.15,556.54 3213.15,516.54 3215.65,519.04 3383.15,519.04
NetD10_C on Top Layer "-6V@TOP" (solid, pour order 1009): 2875.86,1539.04 2875.86,1211.75 2875.65,1211.54 2878.15,1209.04 3005.65,1209.04 3005.65,1536.54 3008.15,1539.04 3006.36,1540.82 2875.86,1540.82
NetD9_C on Top Layer "-6V@TOP" (solid, pour order 1010): 3260.65,1936.54 3325.65,1936.54 3335.65,1926.54 3340.65,1921.54 3340.65,1884.04 3563.15,1884.04 3573.15,1874.04 3585.65,1861.54 3585.65,1744.04 3570.65,1729.04 3445.65,1729.04 3410.65,1764.04 3378.15,1796.54 3378.15,1839.04 3368.15,1849.04 3318.15,1849.04 3280.65,1849.04 3260.65,1869.04 3260.65,1936.54
NetS1_2 on Top Layer "VPWR@TOP" (solid, pour order 1013): 2773.15,331.54 2853.15,331.54 2883.15,301.54 2883.15,221.54 2913.15,191.54 3283.15,191.54 3423.15,331.54 3423.15,459.04 3428.15,454.04 3508.15,454.04 3593.15,369.04 3590.65,366.54 3590.65,229.04 3418.15,56.54 2730.65,59.04 2730.65,186.54 2695.65,259.04 2736.55,323.58
VINPWR on Top Layer "VPWR@TOP" (solid, pour order 1014): 3383.15,624.04 3383.15,484.04 3330.65,431.54 3193.15,431.54 3105.65,344.04 3080.65,319.04 2953.15,319.04 2728.15,319.04 2683.15,274.04 2683.15,81.54 2588.15,81.54 2583.15,76.54 2570.65,76.54 2563.15,84.04 2560.65,86.54 2560.65,114.04 2568.15,121.54 2605.65,121.54 2608.15,121.54 2628.15,141.54 2633.15,146.54 2633.15,209.04 2633.15,294.04 2685.65,346.54 2700.65,361.54 2978.15,361.54 2978.15,366.54 3168.15,556.54 3235.65,624.04 3383.15,624.04
NetL5_1 on Top Layer "VPWR@TOP" (solid, pour order 1015): 2205.65,366.54 2213.15,359.04 2490.65,359.04 2495.65,359.04 2633.15,221.54 2633.15,164.04 2633.15,159.04 2630.65,156.54 2628.15,154.04 2590.65,154.04 2568.15,154.04 2558.15,164.04 2550.65,171.54 2550.65,211.54 2468.15,211.54 2448.15,191.54 2423.15,166.54 2423.15,86.54 2213.15,86.54 2173.15,126.54 2178.15,131.54 2178.15,341.54 2178.15,351.54 2198.15,371.54
VINPWR on Top Layer "VPWR@TOP" (solid, pour order 1016): 3495.65,1219.04 3505.65,1229.04 3505.65,1529.04 3595.65,1619.04 3595.65,1694.04 3608.15,1694.04 3668.15,1754.04 3913.15,1754.04 3940.65,1781.54 3940.65,1934.04 3913.15,1961.54 3663.15,1961.54 3585.65,1884.04 3585.65,1744.04 3553.15,1711.54 3450.65,1711.54 3368.15,1801.54 3368.15,1849.04 3303.15,1849.04 3308.15,1704.04 3398.15,1661.54 3398.15,1601.54 3453.15,1546.54 3438.15,1531.54 3438.15,1219.04
NetD11_A on Top Layer "VPWR@TOP" (solid, pour order 1017): 2883.15,1959.04 3230.65,1959.04 3230.65,1881.54 3230.65,1859.04 3208.15,1836.54 3213.15,1831.54 3213.15,1741.54 3213.15,1719.04 3185.65,1691.54 3183.15,1689.04 2903.15,1689.04 2883.15,1689.04 2880.65,1686.54 2875.65,1691.54 2875.65,1951.54 2883.15,1959.04
NetC32_2 on Top Layer "VOUT@TOP" (solid, pour order 1019): 2750.65,2319.04 2805.65,2264.04 2840.65,2299.04 2895.65,2299.04 2930.65,2334.04 2980.65,2334.04 2998.15,2316.54 2998.15,2199.04 3008.15,2189.04 3125.65,2189.04 3125.65,2151.54 3113.15,2139.04 3000.65,2139.04 2920.65,2219.04 2578.15,2219.04 2578.15,2319.04
3V3 on Top Layer "VPWR@TOP" (solid, pour order 1020): 2340.65,496.54 2340.65,384.04 2330.65,374.04 2160.65,374.04 2073.15,286.54 2073.15,136.54 2106.65,103.04 2472.15,103.04 2495.65,126.54 2503.15,119.04 2543.15,119.04 2543.15,84.04 2530.65,71.54 1948.15,71.54 1945.65,74.04 1813.15,74.04 1790.65,96.54 1793.15,99.04 1793.15,346.54 1943.15,496.54
+5V on Top Layer "+5@TOP" (solid, pour order 1021): 2225.65,631.54 2225.65,681.54 2283.15,681.54 2288.15,686.54 2338.15,736.54 2338.15,854.04 2338.15,856.54 2270.65,924.04 2205.65,924.04 2205.65,979.04 2210.65,984.04 2308.15,984.04 2308.15,1076.54 2335.65,1104.04 2433.15,1201.54 2618.15,1201.54 2650.65,1201.54 2688.15,1164.04 2693.15,1159.04 2693.15,1061.54 2693.15,1051.54 2678.15,1036.54 2673.15,1031.54 2580.65,1031.54 2555.65,1031.54 2460.65,936.54 2463.15,934.04 2463.15,764.04 2463.15,759.04 2445.65,741.54 2443.15,739.04 2398.15,739.04 2393.15,739.04 2360.65,706.54 2358.15,704.04 2358.15,679.04 2358.15,676.54 2348.15,666.54 2345.65,664.04 2318.15,664.04 2310.65,664.04 2280.65,634.04 2278.15,631.54 2225.65,631.54
+5V on Top Layer "+5@TOP" (solid, pour order 1022): 3003.15,2341.54 3170.65,2341.54 3170.65,2463.04 3140.65,2493.04 2870.65,2493.04 2869.65,2493.04 2848.15,2471.54 2845.65,2474.04 2805.65,2474.04 2805.65,2511.54 2808.15,2514.04 2825.65,2531.54 3205.65,2531.54 3553.15,2531.54 3553.15,2101.54 3553.15,2089.04 3538.15,2074.04 3533.15,2069.04 3310.65,2069.04 3310.65,2016.54 3320.65,2006.54 3398.15,1929.04 3398.15,1896.54 3400.65,1894.04 3396.65,1890.04 3340.65,1890.04 3340.65,1926.54 3323.15,1944.04 3283.15,1984.04 3245.65,1984.04 3245.65,2029.04 3203.15,2071.54 3168.15,2106.54 3020.65,2106.54 2995.65,2106.54 2963.15,2074.04 2938.15,2049.04 2908.15,2049.04 2898.15,2049.04 2885.65,2061.54 2885.65,2106.54 2885.65,2111.54 2903.15,2129.04 2905.15,2131.04 3013.15,2131.04 3135.15,2131.04 3176.59,2172.48 3190.65,2186.54 3190.65,2276.54 3030.65,2276.54 3018.15,2289.04 3015.65,2291.54 2985.65,2291.54 2985.65,2339.04 2988.15,2341.54 3003.15,2341.54
-5V on Top Layer "-5@TOP" (solid, pour order 1023): 2995.45,2243.04 2996.45,2244.04 3180.65,2244.04 3180.65,2174.04 3158.15,2151.54 3143.15,2136.54 3113.15,2136.54 3113.15,2176.54 3100.65,2189.04 3096.64,2193.04 2995.45,2193.04 2995.45,2243.04
-5V on Top Layer "-5@Top" (solid, pour order 1024): 2323.15,1389.04 2325.65,1391.54 2325.65,1566.54 2325.65,1594.04 2330.65,1599.04 2518.15,1599.04 2588.15,1599.04 2628.15,1559.04 2633.15,1554.04 2633.15,1424.04 2633.15,1419.04 2623.15,1409.04 2620.65,1406.54 2543.15,1406.54 2513.15,1376.54 2328.15,1376.54 2328.15,1384.04 2323.15,1389.04
HALFREF on Top Layer "HALFREF@TOP" (solid, pour order 1000): 443.15,2031.54 450.65,2039.04 2263.15,2039.04 2263.15,1464.04 2235.65,1436.54 2220.65,1421.54 2220.65,1361.54 2220.65,1351.54 2303.15,1269.04 2320.65,1251.54 2320.65,1226.54 2303.15,1209.04 2255.65,1209.04 2245.65,1209.04 2233.15,1221.54 2233.15,1271.54 2233.15,1276.54 2213.15,1296.54 2210.65,1299.04 2163.15,1299.04 2135.65,1299.04 2130.65,1304.04 2115.65,1319.04 2115.65,1951.54 443.15,1951.54 443.15,2031.54
ELEC0 on Top Layer "ELEC@TOP" (solid, pour order 1000): 437.5,2647.5 530,2647.5 530,2400 437.5,2400 437.5,2647.5
GND on Top Layer "gnd@TOP" (solid, pour order 1018): 388.15,2390 2178.15,2390 2178.15,2648.15 2260,2730 2654.63,2730 2705,2658.19 2705,2397.5 2582.28,2397.5 2582.58,2545.28 2500,2546.84 2500,2373.23 2305,2165 2225,2165 2100.65,2041.54 395.65,2041.54 388.15,2049.04
ELEC1 on Top Layer "ELEC@TOP" (solid, pour order 1001): 537.5,2647.5 630,2647.5 630,2400 537.5,2400 537.5,2647.5
ELEC2 on Top Layer "ELEC@TOP" (solid, pour order 1002): 637.5,2647.5 730,2647.5 730,2400 637.5,2400 637.5,2647.5
ELEC3 on Top Layer "ELEC@TOP" (solid, pour order 1003): 737.5,2647.5 830,2647.5 830,2400 737.5,2400 737.5,2647.5
ELEC5 on Top Layer "ELEC@TOP" (solid, pour order 1004): 837.5,2647.5 930,2647.5 930,2400 837.5,2400 837.5,2647.5
ELEC6 on Top Layer "ELEC@TOP" (solid, pour order 1005): 937.5,2647.5 1030,2647.5 1030,2400 937.5,2400 937.5,2647.5
ELEC7 on Top Layer "ELEC@TOP" (solid, pour order 1006): 1037.5,2647.5 1130,2647.5 1130,2400 1037.5,2400 1037.5,2647.5
ELEC8 on Top Layer "ELEC@TOP" (solid, pour order 1007): 1140,2647.5 1232.5,2647.5 1232.5,2400 1140,2400 1140,2647.5
ELEC9 on Top Layer "ELEC@TOP" (solid, pour order 1008): 1240,2647.5 1332.5,2647.5 1332.5,2400 1240,2400 1240,2647.5
ELEC10 on Top Layer "ELEC@TOP" (solid, pour order 1009): 1337.5,2647.5 1430,2647.5 1430,2400 1337.5,2400 1337.5,2647.5
ELEC11 on Top Layer "ELEC@TOP" (solid, pour order 1010): 1437.5,2647.5 1530,2647.5 1530,2400 1437.5,2400 1437.5,2647.5
ELEC12 on Top Layer "ELEC@TOP" (solid, pour order 1011): 1537.5,2647.5 1630,2647.5 1630,2400 1537.5,2400 1537.5,2647.5
ELEC13 on Top Layer "ELEC@TOP" (solid, pour order 1012): 1637.5,2647.5 1730,2647.5 1730,2400 1637.5,2400 1637.5,2647.5
ELEC14 on Top Layer "ELEC@TOP" (solid, pour order 1013): 1737.5,2647.5 1830,2647.5 1830,2400 1737.5,2400 1737.5,2647.5
ELEC15 on Top Layer "ELEC@TOP" (solid, pour order 1014): 1837.5,2647.5 1930,2647.5 1930,2400 1837.5,2400 1837.5,2647.5
+6V on Top Layer "+6@TOP" (solid, pour order 1012): 2632.5,695.15 2473.15,694.19 2473.15,921.54 2513.15,961.54 2665.65,961.54 2695.65,991.54 2695.65,1044.04 2703.15,1051.54 2765.65,1051.54 2780.65,1036.54 2780.65,968.68 2733.15,921.18 2733.15,816.22 2632.5,817.5
NetD12_C on Top Layer "+6@TOP" (solid, pour order 1011): 3123.15,1211.54 3118.15,1206.54 2960.65,1206.54 2870.65,1116.54 2870.65,986.54 2843.15,959.04 2765.65,959.04 2755.65,941.54 2755.65,844.04 2733.15,821.54 2640,822.5 2640,527.5 2473.15,529.04 2473.15,364.04 2773.15,361.54 2770.65,746.54 2828.15,811.54 2828.15,899.04 2875.65,946.54 3028.15,946.54 3168.15,1086.54 3168.15,1189.04 3145.65,1211.54
GND on GND "GND@GND" (solid, pour order 1004): 12.5,2730 4227.5,2730 4227.5,49.35 387.52,49.35 33.63,49.35 28.35,44.04 12.5,59.96 12.5,2730
-5V on POWER "-5@PWR" (solid, pour order 1002): 3225.65,1959.87 3225.35,1960.17 3038.15,1960.17 3038.15,1989.04 2963.15,2064.04 2963.15,2121.54 2955.65,2129.04 2888.15,2129.04 2873.15,2114.04 2872.5,1692.5 2828.15,1646.54 2555.65,1374.04 2553.15,1376.54 2515.65,1376.54 2450.65,1441.54 2450.65,1856.54 2993.15,2399.04 3218.15,2399.04 3225.65,2391.54
+5V on POWER "+5@TOP" (solid, pour order 1003): 398.15,2106.54 400.65,2104.04 2385.65,2104.04 2800.65,2519.04 3572.5,2520 3572.5,1922.5 3525.65,1876.54 3523.15,1879.04 2983.15,1879.04 2888.71,2057.01 2887.64,2112.59 2953.15,2111.54 2953.15,2029.04 2988.15,2006.54 3038.15,1976.54 3038.15,1931.54 3225.65,1931.54 3225.65,2406.54 3005.65,2406.54 2450.65,1886.81 2450.65,1399.04 2475.65,1399.04 2793.15,1081.54 2733.15,1021.54 2733.15,556.54 2336.57,556.54 2332.96,1181.35 2335.65,1208.43 2333.15,1256.54 2333.15,1819.04 393.15,1819.04 393.15,2119.04
3V3 on POWER "3V3@PWR" (solid, pour order 1001): 680.65,1836.54 2335.65,1836.54 2335.65,554.04 2463.15,426.54 2463.15,154.04 675.65,154.04 680.65,159.04